# Altium PCB Amoled_rev1.1.PcbDoc
Units mil, origin at the board's own origin, x right, y up, seen from the top; angles counter-clockwise.
Board outline 1929.16 x 1325.5 mil, 2 copper layers (Top Layer, Bottom Layer); 43 components, 36 nets, 216 pads, 67 vias.
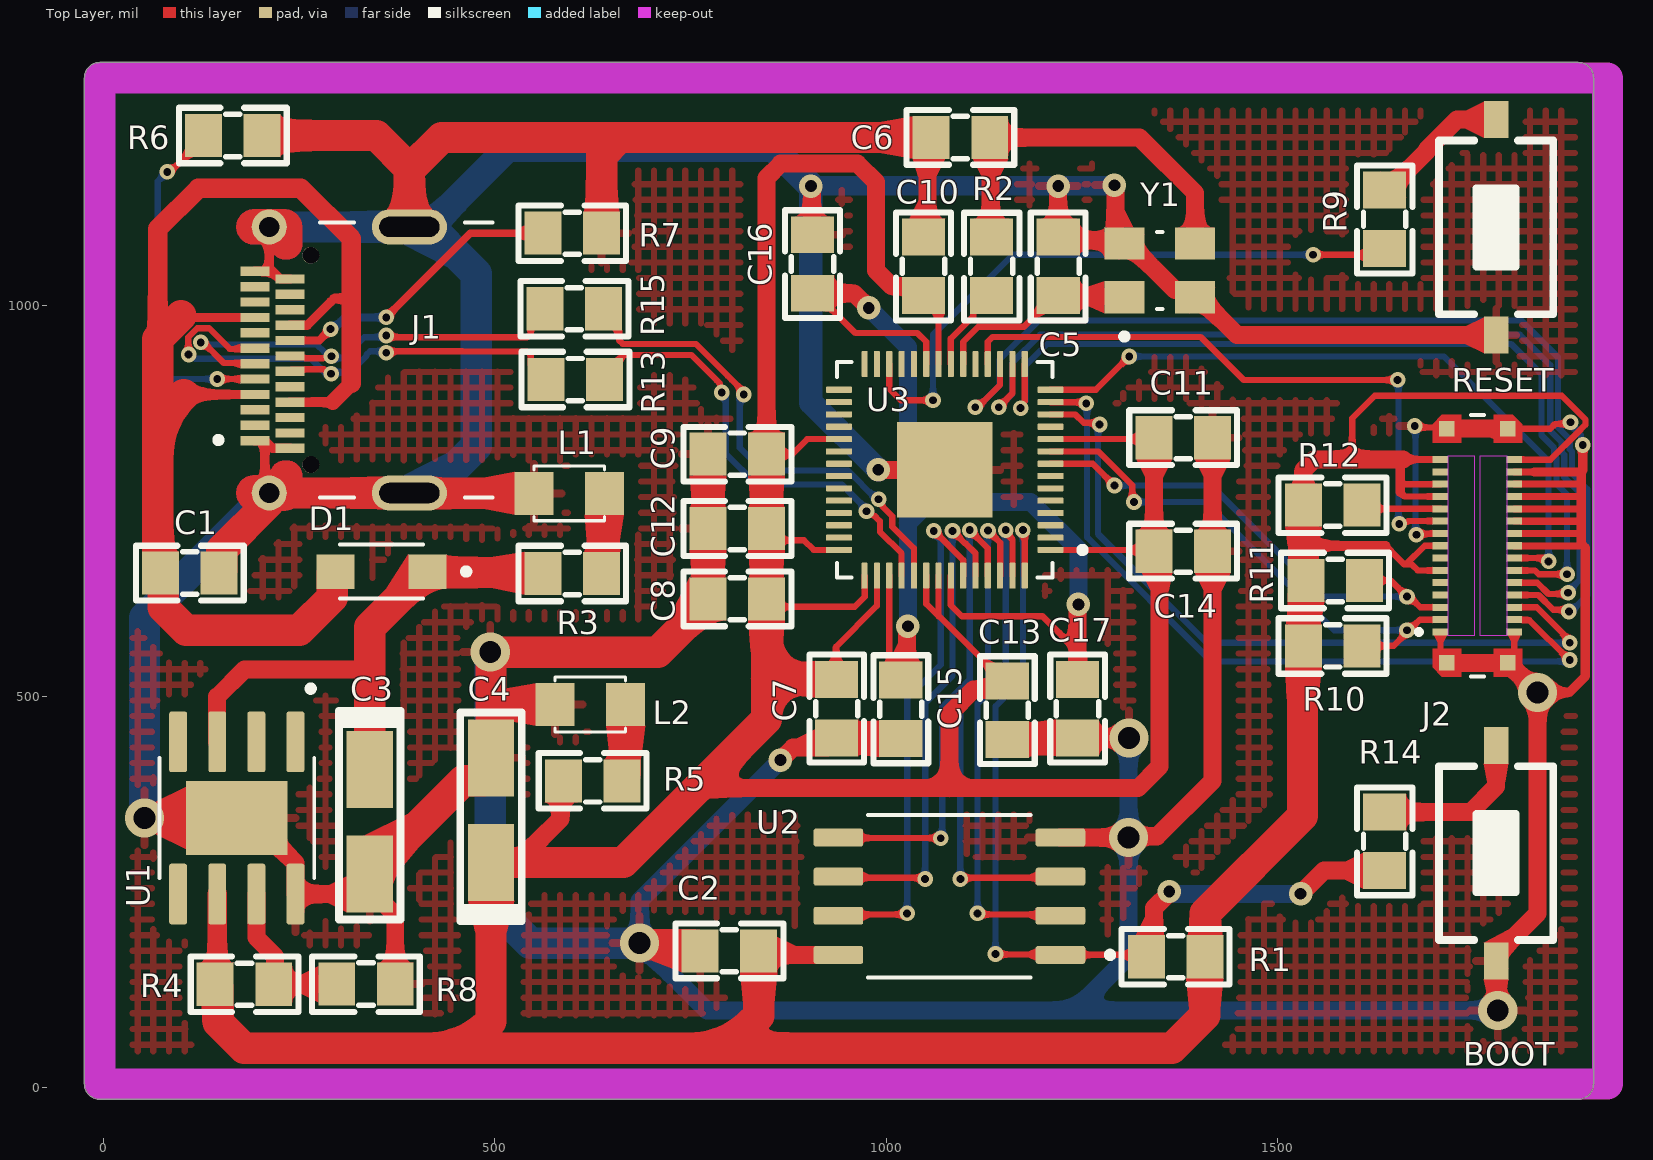
[diagram p0: Top Layer view]
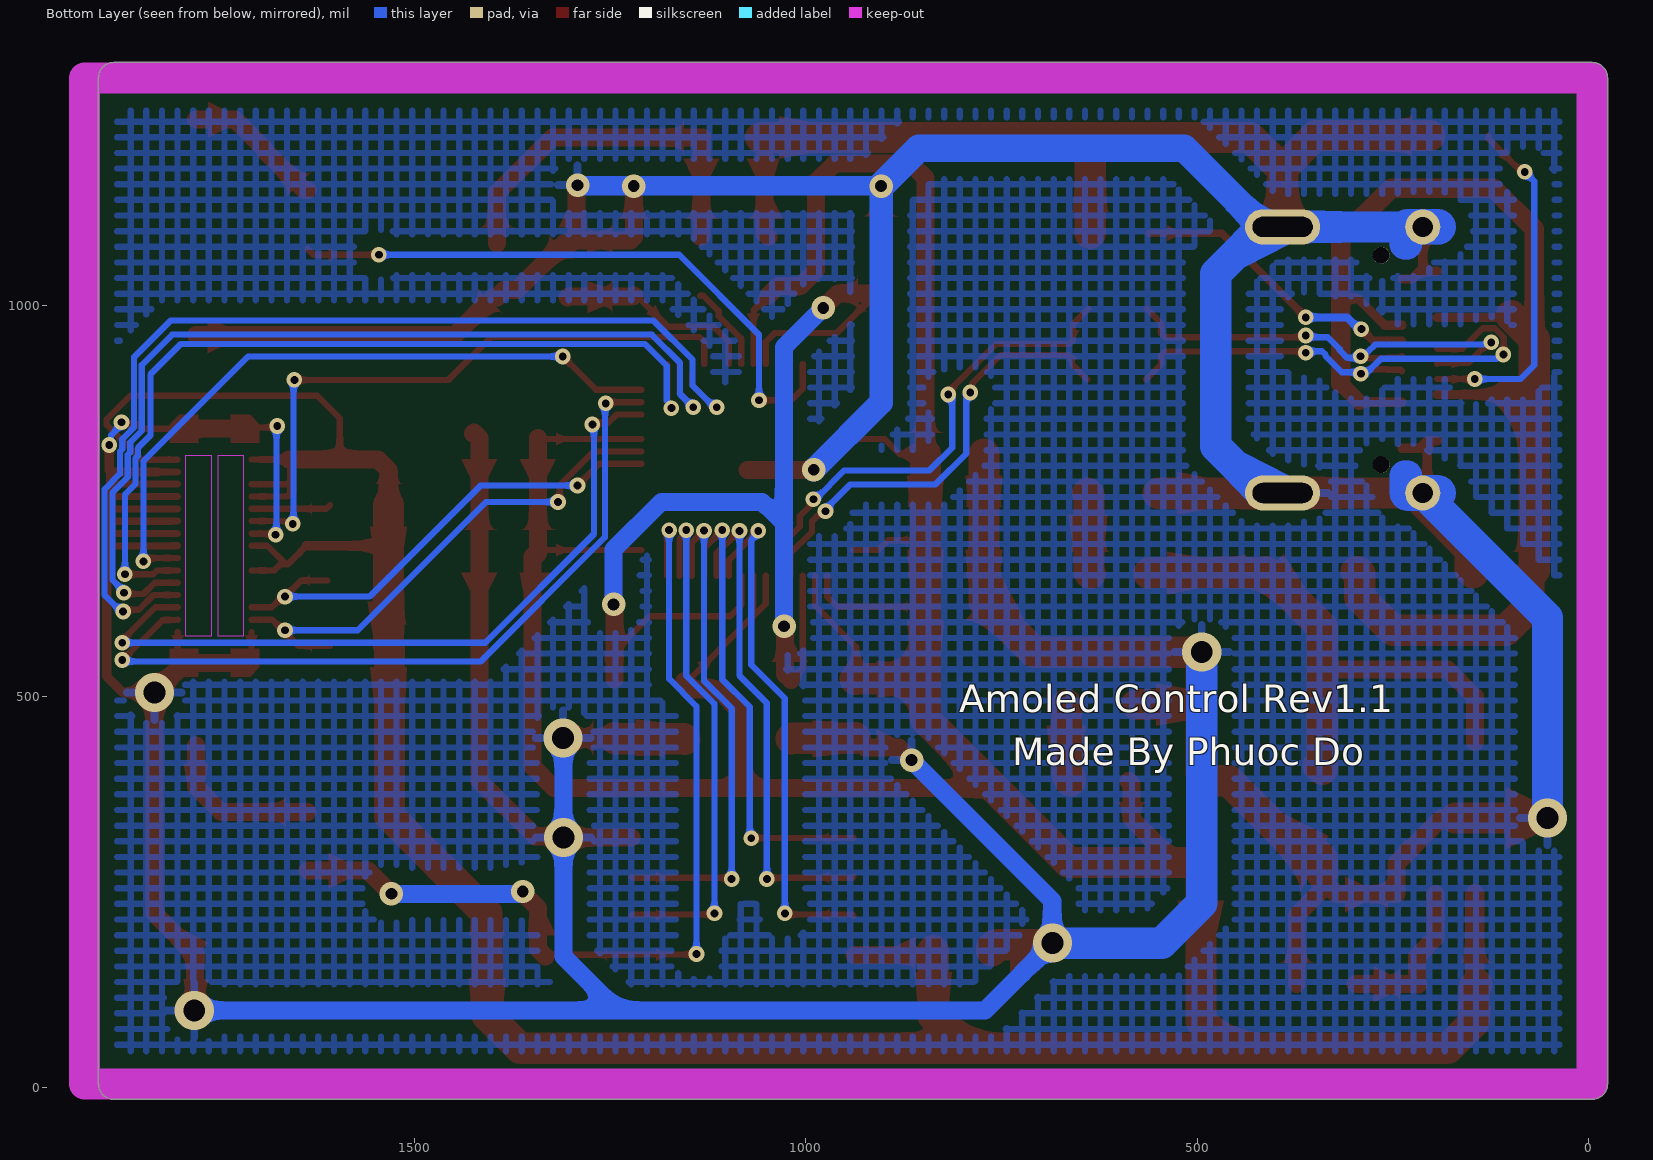
[diagram p1: Bottom Layer view, seen from below]
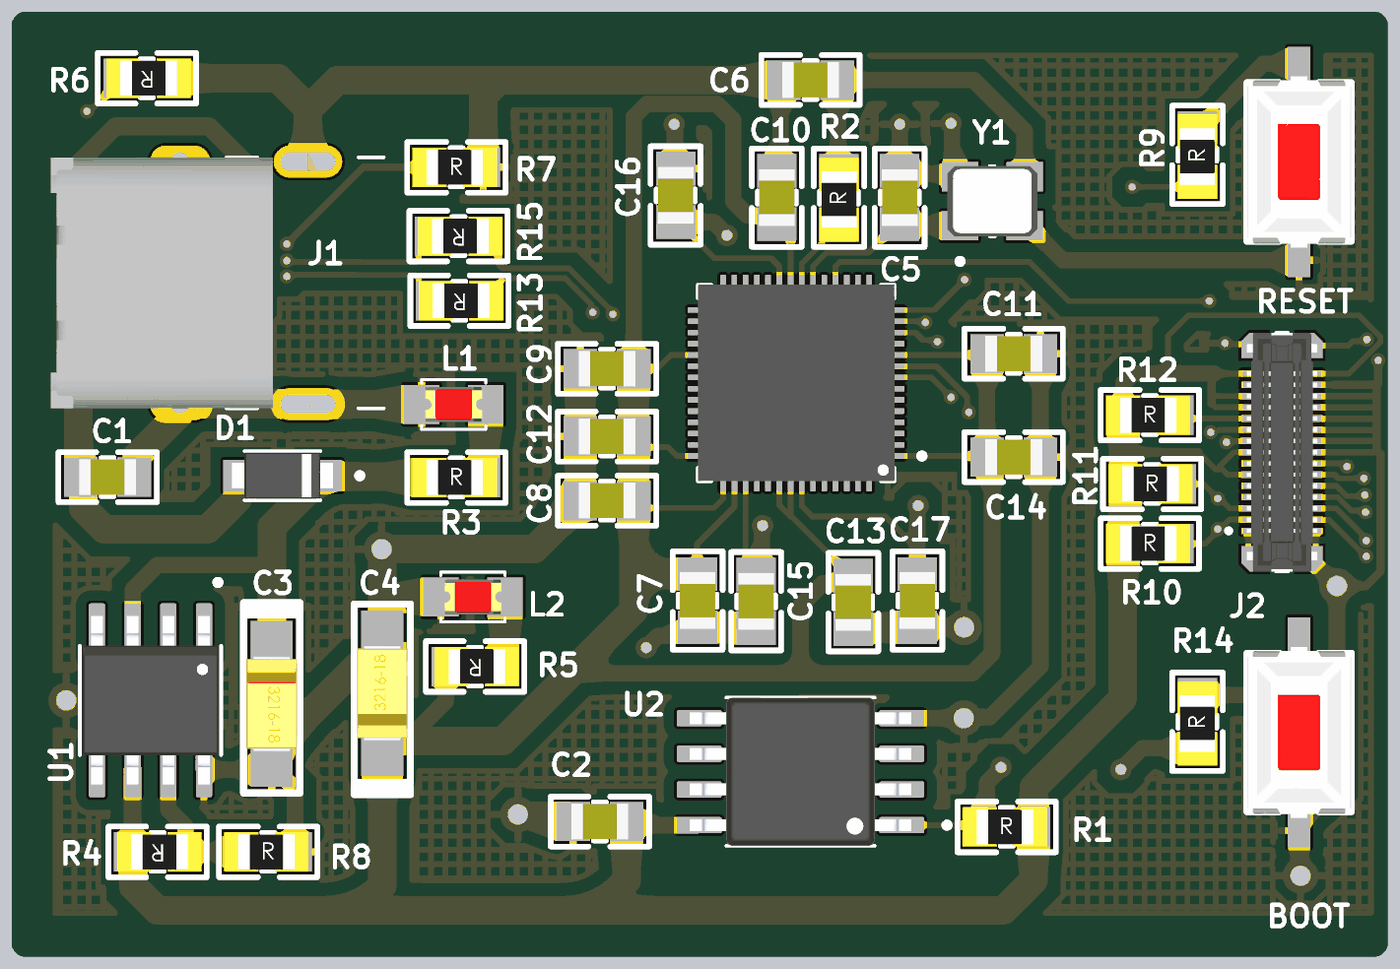
[diagram p2: 3D render of the assembled board from above, using the file's embedded part models]

## Layer stack, top to bottom
Top Solder: solder mask 0.4, Solder Resist, Dk 3.5
Top Layer: signal copper 1.4
Dielectric 1: dielectric 12.6, FR-4, Dk 4.8
Bottom Layer: signal copper 1.4
Bottom Solder: solder mask 0.4, Solder Resist, Dk 3.5

## Board outline
-24.7,5 ccw(c-5,5) -5,-14.7 1884.76,-14.7 ccw(c1884.76,5) 1904.46,5 1904.46,1291.1 ccw(c1884.76,1291.1) 1884.76,1310.8 -5,1310.8 ccw(c-5,1291.1) -24.7,1291.1

## Design rules (kind name [scope] priority, off if disabled: settings)
Clearance Clearance_1 [All vs InPolygon] p1: gap=18 ignorepadtopadclearanceinfootprint=FALSE
Clearance [All] p2: gap=2 ignorepadtopadclearanceinfootprint=FALSE
DiffPairsRouting [All] p1: maxlimit=10 minlimit=6 mostfreqgap=10 toplayer_minwidth=8 toplayer_maxwidth=8 toplayer_prefwidth=8 bottomlayer_minwidth=8 bottomlayer_maxwidth=8 bottomlayer_prefwidth=8 maxuncoupledlength=500
PolygonConnect [All] p1: connectstyle=Relief reliefconductorwidth=10 reliefentries=4 polygonreliefangle="90 Angle" airgapwidth=10
RoutingVias [All] p1: holewidth=15 width=30 viastyle="Through Hole" minholewidth=10 minwidth=20 maxholewidth=28 maxwidth=50
SolderMaskExpansion SolderMaskExpansion_1 [IsVia] p1: expansion=4 istentingtop=TRUE
SolderMaskExpansion [All] p2: expansion=4 istentingtop=FALSE
SupplyNets "Schematic Supply Nets_3" [InNet('3.3V')] p1: voltage=0.000
SupplyNets "Schematic Supply Nets_2" [InNet('GND')] p2: voltage=0.000
SupplyNets "Schematic Supply Nets_1" [InNet('1.1V')] p3: voltage=0.000
SupplyNets "Schematic Supply Nets" [InNet('5V')] p4: voltage=0.000
Width [All] p1: maxlimit=40 minlimit=8 preferedwidth=23
29 further rules are at their usual default settings.

## Classes and differential pairs
differential pair USB: +USB_P -USB_N
differential pair D: +D_P -D_N

## Components (designator, comment, footprint, x,y, rotation, side; value= is the part's Value field where it differs from the comment)
BOOT "Nut Nhan 2 Chan SMD 3x6x2.5" "Nut Nhan 2 Chan SMD 3x6x2.5" 1780,300 r90 top (schematic designator BT2)
C1 "105" "tu 0805" 110,658 r180 top
C2 "225" "tu 0805" 800,175 r180 top
C3 "10uF" "tu tantalum smd3216" 340,340 r270 top
C4 "10uF" "tu tantalum smd3216" 495,355 r90 top
C5 "15pF" "tu 0805" 1220,1050 r90 top
C6 "15pF" "tu 0805" 1095,1215 r0 top
C7 "105" "tu 0805" 937,485 r270 top
C8 "104" "tu 0805" 810,625 r180 top
C9 "104" "tu 0805" 810,810 r180 top
C10 "104" "tu 0805" 1047.87,1050 r90 top
C11 "104" "tu 0805" 1379.83,831.13 r0 top
C12 "104" "tu 0805" 810,715 r180 top
C13 "104" "tu 0805" 1155.13,482.77 r270 top
C14 "104" "tu 0805" 1379.83,686.13 r0 top
C15 "105" "tu 0805" 1019,484 r270 top
C16 "104" "tu 0805" 906,1053 r90 top
C17 "104" "tu 0805" 1245,485 r270 top
D1 "Diode" SODFL3619X98N 355,660.05 r180 top
J1 "USB-C" USB-C 341.42,930.51 r90 top
J2 "AXE530127" PANASONIC_AXE530127 1756,693 r90 top
L1 "LED 0805" LED-0805-Red 640,760 r180 top
L2 "LED 0805" LED-0805-Red 667,490 r180 top
R1 "Not Connect" "tro smd 0805" 1370,170 r0 top
R2 "1k" "tro smd 0805" 1132.61,1049.9 r90 top
R3 "1k" "tro smd 0805" 598.83,660 r0 top
R4 "56k" "tro smd 0805" 180,130 r180 top
R5 "220R" "tro smd 0805" 625,390 r180 top
R6 "5.1k" "tro smd 0805" 165,1215 r180 top
R7 "5.1k" "tro smd 0805" 598.83,1095 r0 top
R8 "10k" "tro smd 0805" 335,135 r0 top
R9 "1k" "tro smd 0805" 1635,1110 r90 top
R10 "10k" "tro smd 0805" 1570.83,567.39 r0 top
R11 "10k" "tro smd 0805" 1574,651 r0 top
R12 "10k" "tro smd 0805" 1570.83,747.39 r0 top
R13 "27R" "tro smd 0805" 603,903 r180 top
R14 "1k" "tro smd 0805" 1635,315 r90 top
R15 "27R" "tro smd 0805" 601.77,993.61 r180 top
RESET "Nut Nhan 2 Chan SMD 3x6x2.5" "Nut Nhan 2 Chan SMD 3x6x2.5" 1780,1100 r90 top (schematic designator BT1)
U1 "IC_RT9048GSP" "SOP-8(Exposed Pad)" 170,345 r270 top
U2 "W25Q128JVSIQ" SOIC127P790X216-8N 1081.07,245 r180 top
U3 "RP2040" RP2040 1075,790 r180 top
Y1 "Thach Anh ABM8" XTAL_ABM8-272-T3 1350,1045 r90 top

## Footprints (in the part's own frame and the unit in brackets; to place one, negate y for a bottom-side part, rotate by r counter-clockwise, add the part's x,y. Pads: shape width x height; smd on the part's side, far side on the other; paste and mask are expansions set on the pad)
LED-0805-Red [mil]
  rect 50x55 smd: 1(0,0) 2(90,0)
  silkscreen extent 0,-35 90,35, body extent 5,-25 85,25, height 43
"Nut Nhan 2 Chan SMD 3x6x2.5" [mm] "Switch SMD type"
  rect 1.2x0.8 smd: 1(-3.5,0) 2(3.5,0)
  silkscreen extent -2.82,-1.85 2.82,1.85, body extent -3.05,-1.85 3.05,1.85, height 2.5
PANASONIC_AXE530127 [mm]
  rect 0.23x0.5 smd paste-1: 1(-2.8,1.2) 2(-2.8,-1.2) 3(-2.4,1.2) 4(-2.4,-1.2) 5(-2,1.2) 6(-2,-1.2) 7(-1.6,1.2) 8(-1.6,-1.2) 9(-1.2,1.2) 10(-1.2,-1.2) 11(-0.8,1.2) 12(-0.8,-1.2) 13(-0.4,1.2) 14(-0.4,-1.2) 15(0,1.2) 16(0,-1.2) 17(0.4,1.2) 18(0.4,-1.2) 19(0.8,1.2) 20(0.8,-1.2) 21(1.2,1.2) 22(1.2,-1.2) 23(1.6,1.2) 24(1.6,-1.2) 25(2,1.2) 26(2,-1.2) 27(2.4,1.2) 28(2.4,-1.2) 29(2.8,1.2) 30(2.8,-1.2)
  rect 0.5x0.5 smd paste-1 mask+0: S1(-3.8,0.99) S2(-3.8,-0.99) S3(3.8,0.99) S4(3.8,-0.99)
  Top Layer region: -3.35,0.53 -4.25,0.53 -4.25,1.15 -3.95,1.45 -3.35,1.45
  Top Layer region: 4.25,1.15 4.25,0.53 3.35,0.53 3.35,1.45 3.95,1.45
  Top Layer region: 4.25,-1.15 3.95,-1.45 3.35,-1.45 3.35,-0.53 4.25,-0.53
  Top Layer region: -3.35,-1.45 -3.95,-1.45 -4.25,-1.15 -4.25,-0.53 -3.35,-0.53
  Keep-Out Layer region: 2.915,0.1 -2.915,0.1 -2.915,0.95 2.915,0.95
  Keep-Out Layer region: 2.915,-0.95 -2.915,-0.95 -2.915,-0.1 2.915,-0.1
  Keep-Out Layer region: 2.915,0.1 -2.915,0.1 -2.915,0.95 2.915,0.95
  Keep-Out Layer region: 2.915,-0.95 -2.915,-0.95 -2.915,-0.1 2.915,-0.1
  silkscreen extent -4.25,-0.21 4.25,1.98, body extent -4.25,-1.25 4.25,1.25, height 0.77
RP2040 [mm]
  rrect25% 0.84x0.2 smd: 1(-3.435,2.6) 2(-3.435,2.2) 3(-3.435,1.8) 4(-3.435,1.4) 5(-3.435,1) 6(-3.435,0.6) 7(-3.435,0.2) 8(-3.435,-0.2) 9(-3.435,-0.6) 10(-3.435,-1) 11(-3.435,-1.4) 12(-3.435,-1.8) 13(-3.435,-2.2) 14(-3.435,-2.6) 29(3.435,-2.6) 30(3.435,-2.2) 31(3.435,-1.8) 32(3.435,-1.4) 33(3.435,-1) 34(3.435,-0.6) 35(3.435,-0.2) 36(3.435,0.2) 37(3.435,0.6) 38(3.435,1) 39(3.435,1.4) 40(3.435,1.8) 41(3.435,2.2) 42(3.435,2.6)
  rrect25% 0.2x0.84 smd: 15(-2.6,-3.435) 16(-2.2,-3.435) 17(-1.8,-3.435) 18(-1.4,-3.435) 19(-1,-3.435) 20(-0.6,-3.435) 21(-0.2,-3.435) 22(0.2,-3.435) 23(0.6,-3.435) 24(1,-3.435) 25(1.4,-3.435) 26(1.8,-3.435) 27(2.2,-3.435) 28(2.6,-3.435) 43(2.6,3.435) 44(2.2,3.435) 45(1.8,3.435) 46(1.4,3.435) 47(1,3.435) 48(0.6,3.435) 49(0.2,3.435) 50(-0.2,3.435) 51(-0.6,3.435) 52(-1,3.435) 53(-1.4,3.435) 54(-1.8,3.435) 55(-2.2,3.435) 56(-2.6,3.435)
  rect 3.1x3.1 smd paste-0.57: 57(0,0)
  silkscreen extent -4.57,-3.5 3.5,3.5, body extent -3.5,-3.5 3.5,3.5, height 0.9
SODFL3619X98N [mm]
  rect 1.24x1.12 smd: A(1.49,0) K(-1.49,0)
  silkscreen extent -2.85,-0.87 1.35,0.87, body extent -1.8,-0.82 1.8,0.82, height 0.98
SOIC127P790X216-8N [mm]
  rrect25% 1.61x0.58 smd: 1(-3.605,1.905) 2(-3.605,0.635) 3(-3.605,-0.635) 4(-3.605,-1.905) 5(3.605,-1.905) 6(3.605,-0.635) 7(3.605,0.635) 8(3.605,1.905)
  silkscreen extent -5.32,-2.64 2.64,2.64, body extent -3.95,-2.64 3.95,2.64, height 2.16
"SOP-8(Exposed Pad)" [mm]
  rrect25% 1.97x0.58 smd: 1(-2.47,1.905) 2(-2.47,0.635) 3(-2.47,-0.635) 4(-2.47,-1.905) 5(2.47,-1.905) 6(2.47,-0.635) 7(2.47,0.635) 8(2.47,1.905)
  rect 2.413x3.302 smd paste-3: 9(0,0)
  silkscreen extent -4.3,-2.51 1.95,2.51, body extent -3,-2.45 3,2.45, height 1.75
"tro smd 0805" [mm]
  rect 1.2x1.4 smd: 1(-0.946,-0.061) 2(0.954,-0.061)
  silkscreen extent -1.75,-0.97 1.75,0.84, body extent -1.56,-0.76 1.44,0.64, height 0.53
"tu 0805" [mm] "Compoment SMD 80x50mil"
  rect 1.2x1.4 smd: 1(-0.946,-0.003) 2(0.954,-0.003)
  silkscreen extent -1.75,-0.89 1.75,0.89, body extent -1.01,-0.64 1.01,0.63, height 0.61
"tu tantalum smd3216" [mm]
  rect 2.5x1.5 smd: 1(-1.7,0) 2(1.7,0)
  silkscreen extent -3.61,-1 3.18,1, body extent -1.7,-0.9 1.7,0.9, height 1.69
USB-C [mm]
  rect 0.3x0.95 smd: A1(-2.62,3.765) A2(-2.12,3.765) A3(-1.62,3.765) A4(-1.12,3.765) A5(-0.62,3.765) A6(-0.12,3.765) A7(0.38,3.765) A8(0.88,3.765) A9(1.38,3.765) A10(1.88,3.765) A11(2.38,3.765) A12(2.88,3.765) B1(2.63,2.625) B2(2.13,2.625) B3(1.63,2.625) B4(1.13,2.625) B5(0.63,2.625) B6(0.13,2.625) B7(-0.37,2.625) B8(-0.87,2.625) B9(-1.37,2.625) B10(-1.87,2.625) B11(-2.37,2.625) B12(-2.87,2.625)
  round 1.14 hole 0.65 mask+0: SH1(-4.32,3.3) SH2(4.32,3.3)
  oval 1.14x2.44 hole 0.65 slot 1.95 at 90 deg: SH3(-4.32,-1.25) SH4(4.32,-1.25)
  round 0.55 hole 0.55 unplated: ""(-3.4,1.95) ""(3.4,1.95)
  Top Layer region: 156 vertices and 0 holes, not listed, extent 3.272,2.23 4.89,4.37
  Top Layer region: 156 vertices and 0 holes, not listed, extent -4.89,2.23 -3.272,4.37
  Bottom Layer region: 156 vertices and 0 holes, not listed, extent 3.272,2.23 4.89,4.37
  Bottom Layer region: 156 vertices and 0 holes, not listed, extent -4.89,2.23 -3.272,4.37
  silkscreen extent -4.47,-3.95 4.47,5.05, body extent -4.47,0 4.47,8.1, height 1.58
XTAL_ABM8-272-T3 [mm]
  rect 1.05x1.3 smd: 1(-0.875,1.15) 2(-0.875,-1.15) 3(0.875,-1.15) 4(0.875,1.15)
  silkscreen extent -2.24,-0.09 1.25,1.25, body extent -1.25,-1.6 1.25,1.6, height 0.7

## Part data
C1 C7 C15: library part "Tu 0805 105 50V 10%", "Dán", Chung_Loai=Dán, Don_Vi=Con, Ma_Hang=MH004552, So_Chan=2, Ten_Linh_Kien="Tụ 0805 105-1uF 10% 50V"
C2: library part "Tu 0805 225 25V 10%", "Dán", Chung_Loai=Dán, Don_Vi=Con, Ma_Hang=MH007483, So_Chan=2, Ten_Linh_Kien="Tụ 0805 225-2.2uF 25V 10%"
C3 C4: library part "Tu tantalum 10uF 16V SMD3216", "Dán", Chung_Loai=Dán, Don_Vi=Con, Ma_Hang=MH001954, So_Chan=2, Ten_Linh_Kien="Tụ tantalum 106C-10uF 16V SMD3216"
C5 C6: library part "Tu 0805 15pF 50V 10%", "Dán", Chung_Loai=Dán, Don_Vi=Con, Ma_Hang=MH004556, So_Chan=2, Ten_Linh_Kien="Tụ 0805 15P 10% 50V"
C8 C9 C10 C11 C12 C13 C14 C16 C17: library part "Tu 0805 104 50V 10%", "Dán", Chung_Loai=Dán, Don_Vi=Con, Ma_Hang=MH004551, So_Chan=2, Ten_Linh_Kien="Tụ 0805 104-100nF 10% 50V"
D1: library part Diode-MBR230LSFT1G, "Diode Schottky 30 V 2A Surface Mount SOD-123FL", Package="SOD-123FL-2 ON Semiconductor", Check_prices=https://www.snapeda.com/parts/MBR230LSFT1G/Onsemi/view-part/?ref=eda, MF="ON Semiconductor", MP=MBR230LSFT1G, SnapEDA_Link=https://www.snapeda.com/parts/MBR230LSFT1G/Onsemi/view-part/?ref=snap
J1: Package=None, Part Number=TE2345986-1, Availability=Unavailable, MP=2345986-1, Price=None
J2: "30 Position Connector Socket, Center Strip Contacts Surface Mount Gold", Package=None, Availability="In Stock", Check_prices=https://www.snapeda.com/parts/AXE530127/Panasonic/view-part/?ref=eda, MF="Panasonic Electric Works", MP=AXE530127, Price=None, Purchase-URL=https://pricing.snapeda.com/search/part/AXE530127/?ref=eda, SnapEDA_Link=https://www.snapeda.com/parts/AXE530127/Panasonic/view-part/?ref=snap
L1 L2: library part "LED 0805 Do", "Dán", Chung_Loai=Dán, Don_Vi=Con, Ma_Hang=MH000897, Ten_Linh_Kien="LED 0805 Màu Đỏ (Red)"
R1: library part "Tro 0805 5% 0R", "Dán", Chung_Loai=Dán, Don_Vi=Con, Ma_Hang=MH005230, So_Chan=2, Ten_Linh_Kien="Trở 0805 5% 0R"
R2 R3 R9 R14: library part "Tro 0805 5% 1k", "Dán", Chung_Loai=Dán, Don_Vi=Con, Ma_Hang=MH005234, So_Chan=2, Ten_Linh_Kien="Trở 0805 5% 1k"
R4: library part "Tro 0805 1% 510k", "Dán", Chung_Loai=Dán, Don_Vi=Con, Ma_Hang=MH005486, So_Chan=2, Ten_Linh_Kien="Trở 0805 1% 56k"
R5: library part "Tro 0805 5% 220R", "Dán", Chung_Loai=Dán, Don_Vi=Con, Ma_Hang=MH005259, So_Chan=2, Ten_Linh_Kien="Trở 0805 5% 220R"
R6 R7: library part "Tro 0805 1% 5.1k", "Dán", Chung_Loai=Dán, Don_Vi=Con, Ma_Hang=MH008812, So_Chan=2, Ten_Linh_Kien="Trở 0805 1% 5.1k"
R8 R10 R11 R12: library part "Tro 0805 1% 10k", "Dán", Chung_Loai=Dán, Don_Vi=Con, Ma_Hang=MH005473, So_Chan=2, Ten_Linh_Kien="Trở 0805 1% 10k"
R13 R15: library part "Tro 0805 1% 18k", "Dán", Chung_Loai=Dán, Don_Vi=Con, Ma_Hang=MH005477, So_Chan=2, Ten_Linh_Kien="Trở 0805 1% 27R"
U2: "FLASH - NOR Memory IC 128Mb (16M x 8) SPI - Quad I/O, QPI, DTR 133 MHz 8-SOIC", Package="SOIC-8 Winbond Electronics", Check_prices=https://www.snapeda.com/parts/W25Q128JVSIQ/Winbond/view-part/?ref=eda, MF="Winbond Electronics", MP=W25Q128JVSIQ, SnapEDA_Link=https://www.snapeda.com/parts/W25Q128JVSIQ/Winbond/view-part/?ref=snap
U3: "RP2040 chip for Raspberry Pi Pico - ARM® Cortex®-M0+ MCU 32-Bit", Package=None, Check_prices=https://www.snapeda.com/parts/RP2040/Raspberry+Pi/view-part/?ref=eda, MF="Raspberry Pi", MP=RP2040, SnapEDA_Link=https://www.snapeda.com/parts/RP2040/Raspberry+Pi/view-part/?ref=snap
Y1: "12 MHz Â±30ppm Crystal 10pF 50 Ohms 4-SMD, No Lead", Package="NON-STANDARD-4 Abracon", Check_prices=https://www.snapeda.com/parts/ABM8-272-T3/Abracon/view-part/?ref=eda, MF=ABRACON, MP=ABM8-272-T3, SnapEDA_Link=https://www.snapeda.com/parts/ABM8-272-T3/Abracon/view-part/?ref=snap
BOOT RESET: Ma_Hang=MH001036, Ten="Nút Nhấn 2 Chân 3x6x2.5MM SMD"

## Via types
v1: diameter 20, hole 10, Top Layer to Bottom Layer, tented both sides, 50 vias
v2: diameter 30, hole 15, Top Layer to Bottom Layer, tented both sides, 10 vias
v3: diameter 50, hole 28, Top Layer to Bottom Layer, tented both sides, 7 vias

## Nets (pads, with @x,y where several pads share a name; then routed paths per layer and width w, separated by ;. In a path a pad name is that pad's centre, name@x,y a point inside that pad or via, vN(x,y) a via of type N, cw(c..) or ccw(c..) an arc to the next point about the centre after c; other vN are vias at no path point)
1.1V: C15.1 C16.1 C17.1 U3.23 U3.45 U3.50 | length 1560
  Top Layer w8: C16.1@910.07,1015.77 960.84,965 1040,965 1051.32,953.68 1051.32,925.3 U3.23 ; U3.45 1004.13,535.96 C15.1 ; U3.50 1082.87,617.13 1097,603 1200,603 1244.87,558.13
  Top Layer w23: C16.1 910.07,1015.77 959.23,1015.77 v2(978,997) ; C15.1 1026.66,529.02 1026.66,588.66 v2(1028,590) ; C17.1 1244.87,558.13 1244.87,616.87 v2(1246,618)
  Bottom Layer w23: v2(978,997) 1028,947 1028,721.76 ; v2(1028,590) 1028,721.76 ; v2(1246,618) 1246,688 1185,749 1056,749 1051,744 1050,744 1028,722 1028,721.76
3.3V: C2.1 C4.1 C7.1 C8.1 C9.1 C10.1 C11.1 C12.1 C13.1 C14.1 J2.11 J2.15 J2.23 J2.25 J2.29 J2.30 R1.2 R4.2 R5.2 R10.1 R11.1 R12.1 U1.6 U2.8 U3.1 U3.10 U3.22 U3.33 U3.42 U3.43 U3.44 U3.48 U3.49 | length 7793
  Top Layer w8: C8.1 857.36,615 960,615 972.64,627.64 U3.43 ; C9.1 880.13,810.13 899.37,829.37 U3.33 ; C12.1@852.36,710 852.36,706.06 858.43,700 895,700 907.36,687.64 U3.42 ; C7.1@936.09,523 936.09,564.09 988.39,616.39 U3.44 ; C10.1 1067.13,993.65 U3.22 ; U3.48 1051.38,618.62 1067.13,602.87 ; U3.49 1067.13,602.87 ; C13.1 1151.06,520 1068.19,602.87 1067.13,602.87 ; U3.1 1340.97,687.64 C14.1 ; U3.10 1340.98,829.37 C11.1 ; C14.1@1339.83,685.77 C14.1@1342.61,683 ; 1596,803.24 1596,856 1624.83,884.83 1863.8,884.83 1894.14,854.49 1894.14,847.47 1884.43,837.75 1884.03,837.75 1849.34,803.06 J2.30@1803.42,803.06 ; 1638.63,693 1662.63,669 1672,669 1679.5,661.5 J2.11 ; 1657.26,761.43 1662.69,755.99 J2.23 ; 1657.26,771.74 J2.25 ; 1657.26,799.81 1660.69,803.24 J2.29 ; 1664.69,669 1688.69,693 J2.15
  Top Layer w10: C12.1 C12.1@852.36,710
  Top Layer w12: 1533.61,693 1638.63,693 ; 1657.26,761.43 1657.26,771.74 1657.26,799.81
  Top Layer w20: C2.1 C2.1@842.36,170
  Top Layer w23: 528.07,288.07 583.81,343.81 583.81,388.78 R5.2 ; 759,383 1081,383 ; C2.1@842.36,170 U2.8@938.07,170 ; C9.1 847.23,1163.23 865.37,1181.37 963.63,1181.37 987,1158 987,1045 1007.11,1024.89 1035.88,1024.89 C10.1 ; C13.1 1144.01,509.01 1112.01,509.01 1081,478 1081,383 ; C14.1@1342.61,683 C14.1@1349.66,675.95 ; C11.1 C14.1 1349.66,678.95 C14.1@1349.66,675.95 ; C14.1@1349.83,675.77 C14.1@1349.66,675.95 ; R12.1 1533.61,789.76 1547.08,803.24 1596,803.24 1660.69,803.24 ; 1081,383 1322,383 1349.66,410.66 C14.1@1349.66,675.95
  Top Layer w25: R4.2 145,134.97 U1.6
  Top Layer w40: R4.2 146.05,128.77 146.05,83.95 179.32,50.69 460.69,50.69 ; C2.1 837.23,92.23 795.69,50.69 ; C9.1 C12.1 C8.1 847.23,523 ; C7.1 936.09,523 847.23,523 ; R12.1 1533.61,693 1533.61,655 R10.1 1532.44,563.83 1532.44,347.44 1408.11,223.11 1408.11,168.14 R1.2 1407.57,92.57 1365.69,50.69 795.69,50.69 ; 460.69,50.69 795.69,50.69 ; 460.69,50.69 495,85 C4.1 528.07,288.07 664.07,288.07 759,383 847.23,471.23 847.23,523
5V: C3.1 D1.K R3.1 U1.3 | length 708.3
  Top Layer w23: U1.3 145,500 180,535 340,535
  Top Layer w40: C3.1@345,411.93 C3.1 340,535 340,588.75 411.3,660.05 D1.K 414.88,658.83 560.39,658.83 R3.1
Amoled_CLK: J2.4 U3.13 | length 993.6
  Top Layer w8: U3.13 1210.3,876.55 1254.45,876.55 v1(1256,875) ; J2.4 1803.77,597.98 1822.39,597.98 1873.37,547 v1(1874,547)
  Bottom Layer w8: v1(1256,875) 1257,874 1257,704 1416,545 1872,545 v1(1874,547)
Amoled_CS: J2.6 U3.12 | length 960.8
  Top Layer w8: U3.12 1210.27,860.83 1242.17,860.83 1252.7,850.3 1270.7,850.3 v1(1273,848) ; J2.6 1831.74,614.26 1874,572 v1(1874,569)
  Bottom Layer w8: v1(1273,848) 1271,846 1271,708 1410,569 v1(1874,569)
Amoled_RST: J2.19 U3.18 | length 816.9
  Top Layer w8: U3.18 1130.12,953.88 1136.24,960 1402,960 1457,905 v1(1654,905) ; v1(1656,721) 1658.3,723.3 1666.54,723.3 1667.74,724.5 J2.19
  Bottom Layer w8: v1(1654,905) 1655,904 1655,722 v1(1656,721)
Amoled_SI1: J2.12 U3.15 | length 1141.2
  Top Layer w8: v1(1172,869) 1172,872.25 1177.36,877.61 U3.15 ; J2.12 1829.5,661.5 1834.54,656.46 v1(1870.66,656.46)
  Bottom Layer w8: v1(1172,869) 1172,872.25 1178,878.25 1178,922.86 1206.14,951 1799,951 1838,912 1838,834 1854,818 1854,808.14 1857,805.14 1857,772 1870.66,758.34 v1(1870.66,656.46)
Amoled_SI2: J2.10 U3.16 | length 1233.7
  Top Layer w8: v1(1144,870) 1161.61,887.61 U3.16 ; J2.10 1832.53,645.76 1846.94,631.34 1870.34,631.34 v1(1872,633)
  Bottom Layer w8: v1(1144,870) 1161,887 1161,927 1197,963 1810,963 1849,924 1849,840.23 1864,825.23 1864,812.28 1867,809.28 1867,780.66 1886.66,761 1886.66,649.45 1872,634.79 v1(1872,633)
Amoled_SI3: J2.8 U3.17 | length 1318.4
  Top Layer w8: v1(1114,870) 1117.25,870 1145.8,898.55 U3.17@1145.8,912.69 ; J2.8 1834.13,630.01 1852.85,611.3 1870.7,611.3 v1(1873,609)
  Bottom Layer w8: v1(1114,870) 1117.25,870 1145,897.75 1145,931 1195,981 1812,981 1859.02,933.98 1859.02,844.35 1868.4,834.98 1874,829.37 1874,816.43 1877,813.43 1877,784.8 1896.66,765.14 1896.66,629.55 1876.11,609 v1(1873,609)
Amoled_SIO0: J2.14 U3.14 | length 883.4
  Top Layer w8: U3.14 1268.36,892.36 v1(1311,935) ; J2.14 1839.5,677.25 1843.75,673 v1(1847,673)
  Bottom Layer w8: v1(1311,935) 1713,935 1847,801 v1(1847,673)
D_N: J1.A7 J1.B7 R13.2 | length 684.1
  Top Layer w8: v1(108.44,937.44) 108,937.89 108,959.63 119.37,971 134.57,971 160.94,944.63 192.35,944.63 J1.A7 ; J1.B7 239.98,917.85 256.52,917.85 257.46,918.79 281.42,918.79 287.32,912.89 v1(290.56,912.89) ; v1(361,939.7) 363,941.7 458.32,941.7 458.57,941.44 541.12,941.44 545.8,936.76 545.8,925.02 R13.2
  Bottom Layer w8: v1(108.44,937.44) 111.69,937.44 116.96,932.17 264.91,932.17 281.9,915.19 288.27,915.19 v1(290.56,912.89) ; v1@290.56,910.89 294.56,914.89 315.13,914.89 335.69,935.45 335.69,937.01 340.37,941.7 359,941.7 v1(361,939.7)
D_P: J1.A6 J1.B6 R15.2 | length 620.8
  Top Layer w8: v1(124,953) 127.11,953 153.48,926.63 192.35,926.63 J1.A6 ; J1.B6 239.98,933.72 256.52,933.72 257.46,932.79 280.19,932.79 280.31,932.91 288.58,932.91 v1(290.88,935.21) ; v1(361,961.7) 363,959.7 465.77,959.7 466.03,959.44 541.12,959.44 545.8,964.13 545.8,977.61 R15.2
  Bottom Layer w8: v1(124,953) 126.3,950.7 134.15,950.7 134.69,950.17 272.37,950.17 281.55,940.99 281.85,940.99 287.63,935.21 v1(290.88,935.21) 293.17,932.91 307.66,932.91 ; 307.68,932.89 317.69,942.9 317.69,944.47 332.92,959.7 359,959.7 v1(361,961.7)
GND: BOOT.1 C1.1 C2.2 C3.2 C4.2 C5.2 C6.1 C7.2 C8.2 C9.2 C10.2 C11.2 C12.2 C13.2 C14.2 C15.2 C16.2 C17.2 J1.A1 J1.A12 J1.B1 J1.B12 J1.SH1 J1.SH2 J1.SH3 J1.SH4 J2.1 J2.2 J2.16 J2.17 J2.18 J2.20 J2.22 J2.24 J2.26 J2.28 J2.S1 J2.S2 J2.S3 J2.S4 L1.2 L2.2 R6.1 R7.2 R8.2 RESET.1 U1.8 U1.9 U2.4 U3.57 Y1.2 Y1.4 | length 12216.1
  Top Layer w8: v1(1676,846) 1677.7,844.3 1715.33,844.3 J2.S3 ; v1(1678,707) 1679.22,708.22 1708.23,708.22 J2.17 ; J2.1 1708.76,551.66 J2.S1 ; J2.S2 1803.24,551.66 J2.2 ; J2.S4 1796.78,840.8 1798.49,842.51 1849.02,842.51 1855.19,848.68 1872.73,848.68 v1(1875.02,850.98)
  Top Layer w9: J2.26 1886.58,771.74 1889,774.16 ; J2.28 1828.51,787.49 ; J2.16@1803.42,692.97 1811.28,692.97 1811.42,692.83 1885.6,692.83 1888.6,695.83 ; J2.18@1803.42,708.72 1811.28,708.72 1811.42,708.58 1885.35,708.58 1888.6,711.83 ; J2.20@1803.42,724.47 1811.28,724.47 1811.42,724.32 1887.11,724.32 1888.6,722.83 ; J2.22@1803.42,740.22 1811.28,740.22 1811.42,740.07 1888.36,740.07 1888.6,739.83 ; J2.24@1803.42,755.96 1811.28,755.96 1811.42,755.82 1886.61,755.82 1888.6,753.83
  Top Layer w12: J1.A1 205.8,827.36 J1.A1@205.89,827.27 ; J1.A12 193.28,1043.8 215.72,1043.8 ; J1.SH1 205.89,766.04 J1.A1@205.89,827.27 ; J1.SH2 211.5,1048.02 215.72,1043.8 ; J1.B12 237.98,817.61 215.54,817.61 J1.A1@205.89,827.27 ; J1.B1 225.46,1034.06 215.72,1043.8 ; v3@1780,114.16 1781,113.16 1789,105.16 v3@1789,103 ; 1828.68,787.32 1888.68,787.32 ; v3(1833,505.37) 1873.37,505.37 1894,526 1894,690.43 1888.6,695.83 1888.6,711.83 1888.6,722.83 1888.6,739.83 1888.6,753.83 1888.6,771.74 1888.6,785.6 1888.68,785.68 1888.68,787.32 ; v1(1890.66,821.75) 1890.66,789.3 1888.68,787.32
  Top Layer w23: U1.9 187.5,345 244.92,287.58 244.92,247.84 U1.8 321.97,247.76 C3.2@333.8,259.58 ; C3.2@340,253.39 372.57,220.81 R8.2 ; J1.SH4 410.3,1100.59 J1.SH4@420.41,1110.7 ; v2(865,419) 881.3,435.3 924.74,435.3 C7.2 ; v2(904,1152.87) 905.07,1151.8 905.07,1091.64 C16.2 ; v2(990,790) U3.57 ; C10.2 1052.89,1092.46 1052.89,1209.98 C6.1 ; v2(1220.13,1152.87) C5.2 1224.2,1083.51 Y1.4@1297.11,1083.51 ; U2.4 v3(1310,320) 1311.57,321.57 1346.57,321.57 1417.41,392.41 C14.2 C11.2 1424.41,838 C11.2@1425.75,836.66 ; C17.2 v3(1310.43,447.43) ; v2(1292,1154) 1293.34,1152.66 1293.34,1088.62 1292,1088.62 Y1.4@1297.11,1083.51 ; J2.S1 J2.S2 v3(1833,505.37) 1833,223.08 1780,170.08 BOOT.1 1781,161.2 1781,113.16 1781,100 v3(1782,99) ; J2.S3 1776.87,842.61 1778.67,840.8 J2.S4@1796.78,840.8 ; RESET.1 1448.54,962.2 1400.2,1010.55 Y1.2 1386.11,1019.72 1369.37,1019.72 1309.65,1079.45 Y1.4 ; Y1.4@1297.11,1083.51 1300.66,1083.51 Y1.4 ; Y1.4@1297.11,1083.51 1301.17,1079.45 Y1.4
  Top Layer w40: v3(52,345) U1.9 ; C1.1 150.85,661.76 150.85,687.85 210.56,747.56 210.56,759.5 J1.SH1 J1.SH3 390.85,760.22 549.78,760.22 L1.2 ; R6.1 348.61,1217.39 390.63,1175.37 390.63,1173.63 ; C3.2 340,292.76 349.53,302.28 369.21,302.28 459.65,392.72 485.47,392.72 495,402.24 C4.2 495,488.96 ; J1.SH4 390.63,1173.63 ; L2.2 496.04,490 495,488.96 ; R7.2 636.41,1192.28 659,1214.87 ; v3(685,185) 686.91,183.09 754.47,183.09 754.87,182.69 758.8,182.69 762.43,179.07 C2.2 ; C9.2 C12.2 C8.2 772.43,621.2 708.23,557 v3(494,557) 495,556 495,488.96 ; C7.2 937.37,446.93 1018.37,446.93 C15.2 ; C6.1 659,1214.87 ; C13.2 1156.11,446.31 1243.75,446.31 C17.2 ; 390.63,1173.63 431.87,1214.87 659,1214.87
  Bottom Layer w8: v1(1676,846) 1677,845 1677,708 v1(1678,707) ; v1(1875.02,850.98) 1875.02,847.73 1888.37,834.39 1888.37,824.05 v1(1890.66,821.75)
  Bottom Layer w23: J1.SH4 J1.SH4@416.22,1100.59 ; v2(865,419) 685,239 v3(685,185) 771,99 1241,99 ; v2(904,1152.87) v2@904,1153 ; v3(1310.43,447.43) 1310.21,447.21 1310.21,320.21 v3(1310,320) 1310,168 1241,99 ; v3(1782,99) 1241,99
  Bottom Layer w25: v2@904,1153 v2@1291,1153
  Bottom Layer w30: v2(904,1152.87) 904,876 v2(990,790)
  Bottom Layer w35: J1.SH4@416.22,1100.59 516.63,1201 856,1201 v2@904,1153
  Bottom Layer w40: v3(52,345) 52,600.89 J1.SH1 ; J1.SH2 J1.SH4 ; J1.SH3 416.22,760.43 476,820.21 476,1040.81 J1.SH4@416.22,1100.59 ; v3(494,557) 494,236 545,185 v3(685,185)
NetBT1_2: R9.2 RESET.2 | length 181
  Top Layer w23: R9.2 1641.33,1147.57 1691.6,1197.85 1691.6,1199.65 1729.75,1237.8 RESET.2
NetBT2_2: BOOT.2 R14.2 | length 208.8
  Top Layer w23: R14.2 1747.57,352.57 1780,385 BOOT.2
NetC6_2: C6.2 R2.2 Y1.3 | length 484.8
  Top Layer w23: R2.2 1133.79,1088.68 1133.79,1213.65 C6.2 1324.13,1214.87 1395.28,1143.72 Y1.3
NetJ1_A5: J1.A5 R6.2 | length 451.5
  Top Layer w8: v1(81,1171) 83.3,1173.3 87.26,1173.3 127.43,1213.46 R6.2 ; v1(145.1,906.1) J1.A5
  Bottom Layer w8: v1(81,1171) 69,1159 69,924 86.9,906.1 v1(145.1,906.1)
NetJ1_B5: J1.B5 R7.1 | length 380.4
  Top Layer w10: J1.B5 275.31,955.31 v1(290,970) ; v1(361,985) 468.61,1092.61 R7.1
  Bottom Layer w8: v1(290,970) v1@293.25,970
  Bottom Layer w10: v1@293.25,970 308.25,985 v1(361,985)
NetJ2_21: J2.21 R12.2 | length 102.3
  Top Layer w8: R12.2 1613.17,740.24 J2.21
NetL1_1: L1.1 R3.2 | length 103.9
  Top Layer w40: R3.2 638.2,659.4 638.2,758.2 L1.1
NetL2_1: L2.1 R5.1 | length 99.6
  Top Layer w40: R5.1 662.23,396.33 667,401.1 L2.1
NetR4_1: R4.1 R8.1 U1.7 | length 205.5
  Top Layer w23: U1.7 195.08,247.67 195.08,191.92 219,168 R4.1@219,134.17 ; R4.1 R4.1@219,134.17 ; R8.1 297.67,132.5 220.67,132.5 R4.1@219,134.17
NetR9_1: R9.1 U3.26 | length 800.3
  Top Layer w8: U3.26 1004.13,893.87 1019,879 v1(1060,879) ; v1(1546,1065) 1629.62,1065 R9.1
  Bottom Layer w8: v1(1060,879) 1060,963 1162,1065 v1(1546,1065)
QSPI_SCLK: U2.6 U3.52 | length 641.4
  Top Layer w8: U2.6 940.64,268.5 1048.5,268.5 v1(1050,267) ; v1(1085,712) 1101.22,695.78 1101.89,695.78 1114.37,683.3 U3.52
  Bottom Layer w8: v1(1050,267) 1050,492 1085,527 v1(1085,712)
QSPI_SD0: U2.5 U3.53 | length 608.4
  Top Layer w8: U2.5 939.64,319.5 1069.5,319.5 v1(1070,319) ; v1(1107,713) 1130.12,689.88 U3.53
  Bottom Layer w8: v1(1070,319) 1072,321 1072,487 1107,522 v1(1107,713)
QSPI_SD1: U2.2 U3.55 | length 674
  Top Layer w8: v1(1117,223) 1118.5,221.5 1221.5,221.5 U2.2 ; v1(1153,713) 1153,709.75 1161.61,701.14 U3.55
  Bottom Layer w8: v1(1117,223) 1117,491 1153,527 v1(1153,713)
QSPI_SD2: U2.3 U3.54 | length 653.2
  Top Layer w8: v1(1095,267) 1096.5,268.5 1221.5,268.5 U2.3 ; v1(1130.31,712.31) 1145.87,696.75 U3.54
  Bottom Layer w8: v1(1095,267) 1095,485 1130.31,520.31 v1(1130.31,712.31)
QSPI_SD3: U2.7 U3.51 | length 672.7
  Top Layer w8: U2.7 940.64,221.5 1025.5,221.5 v1(1027,223) ; v1(1061,712) 1061.34,712 1098.62,674.72 U3.51
  Bottom Layer w8: v1(1027,223) 1027,498 1070,541 1070,699.75 1061,708.75 v1(1061,712)
QSPI_SS_N: R1.1 R14.1 U2.1 U3.56 | length 1194.4
  Top Layer w8: v1(1140,171) 1140.5,170.5 1222.5,170.5 U2.1 1330.38,170 R1.1 ; v1(1175,713) 1177.36,710.64 U3.56
  Top Layer w23: R1.1 1342.56,177.39 1342.56,229.67 1362,249.11 v2(1362,251) ; v2(1530,248) 1559.77,277.77 R14.1
  Bottom Layer w8: v1(1140,171) 1140,488 1175,523 v1(1175,713)
  Bottom Layer w23: v2(1362,251) 1365,248 v2(1530,248)
TP_SCL: J2.3 R10.2 U3.9 | length 678.8
  Top Layer w8: U3.9 1271.38,813.62 1314.7,770.3 1314.7,751.3 v1(1317,749) ; R10.2 1648.98,565 v1@1665.99,582.01 ; v1(1665.99,585.01) v1@1665.99,582.01 ; J2.3 1682.49,598.51 v1@1665.99,582.01
  Bottom Layer w8: v1(1317,749) 1409,749 1572.99,585.01 v1(1665.99,585.01)
TP_SDA: J2.5 R11.2 U3.8 | length 637.5
  Top Layer w8: U3.8 1264.13,797.87 v1(1292,770) ; R11.2 1645.39,648.61 v1(1666,628) 1669.25,628 1682.99,614.26 J2.5
  Bottom Layer w8: v1(1292,770) 1416,770 1558,628 v1(1666,628)
USB_N: R13.1 U3.46 | length 588.1
  Top Layer w8: R13.1 659.85,925.02 659.85,932.31 664.54,937 750.92,937 783.6,904.32 787.7,900.22 787.7,891.3 v1(790,889) ; v1(975,737) 978.25,737 983.59,731.65 984.77,731.65 992.23,724.19 992.23,710.8 1019.88,683.15 U3.46
  Bottom Layer w8: v1(790,889) 790,885.75 795.09,880.66 795.09,810.8 834.61,771.28 943.55,771.28 975,739.83 v1(975,737)
USB_P: R15.1 U3.47 | length 629.9
  Top Layer w8: R15.1 658.62,976.38 658.62,955.69 663.31,951 756.72,951 797.6,910.12 802.74,904.98 818.18,889.54 v1(818.18,886.29) ; v1(990.56,752.56) 990.56,749.31 995.9,743.96 995.9,742.79 1007.98,730.72 1007.98,717.32 1035.63,689.67 U3.47
  Bottom Layer w8: v1(818.18,886.29) 818.18,883.04 813.09,877.95 813.09,818.25 842.07,789.28 951.01,789.28 987.73,752.56 v1(990.56,752.56)
VBUS: C1.2 D1.A J1.A4 J1.A9 J1.B4 J1.B9 | length 1705.9
  Top Layer w8: 290,1005 294,1009
  Top Layer w12: 98.6,986.99 100.75,984.84 J1.A9 ; 102.32,886.42 J1.A4 ; J1.B9 292.48,876.57 ; J1.B4 260,975 290,1005 ; 294,1009 316.42,1009
  Top Layer w20: 292.48,876.57 316.42,900.51
  Top Layer w25: 68.84,952.94 68.84,957.24 68.84,1097.94 120.91,1150 251.93,1150 316.42,1085.51 316.42,1009 316.42,900.51
  Top Layer w40: 68.84,952.94 68.84,852.94 ; 68.84,957.24 98.6,986.99 ; 102.32,886.42 68.84,852.94 ; D1.A 293.98,660.05 291.93,658 291.93,626.93 250,585 105,585 76.05,613.95 76.05,654.51 C1.2 68.84,661.72 68.84,852.94
XIN: C5.1 U3.20 Y1.1 | length 259.9
  Top Layer w8: U3.20 1098.62,953.62 1118,973 1176.43,973 1216.2,1012.77 C5.1
  Top Layer w23: C5.1 1221.24,1011.66 1303.61,1011.66 Y1.1
XOUT: R2.1 U3.21 | length 111.3
  Top Layer w8: U3.21 1082.87,957.87 1111.44,986.44 1111.44,993.05 1131.06,1012.67 R2.1
pads on no net: J1. J1.A2 J1.A3 J1.A8 J1.A10 J1.A11 J1.B2 J1.B3 J1.B8 J1.B10 J1.B11 J2.7 J2.9 J2.13 J2.27 U1.1 U1.2 U1.4 U1.5 U3.2 U3.3 U3.4 U3.5 U3.6 U3.7 U3.11 U3.19 U3.24 U3.25 U3.27 U3.28 U3.29 U3.30 U3.31 U3.32 U3.34 U3.35 U3.36 U3.37 U3.38 U3.39 U3.40 U3.41

## Polygon pours and split planes (outlines as drawn)
GND on Bottom Layer "GND_L02_P000" (hatched 90Degree grid 20 track 8, remove dead copper, pour order 0): -23,1347 3,1321 1987,1321 1987,-65 1970,-82 -58,-82
GND on Top Layer "GND_L01_P001" (hatched 90Degree grid 20 track 8, remove dead copper, pour order 1): -49,1321 1987,1321 1970,1304 1970,-34 -53,-34 -62,-43

## Keep-outs
Keep-Out Layer:
  lines w39.37: -5,5 -5,1291.1 1922.35,1291.1 1922.35,5 -5,5

## Silkscreen, mask and mechanical layers (free items; w line width, h text height)
Bottom Overlay:
  text "Amoled Control Rev1.1" at 804,480 h35
  text "Made By Phuoc Do" at 736,412.66 h35